# Altium PCB PCB1.PcbDoc
Units mm, origin at the board's own origin, x right, y up, seen from the top; angles counter-clockwise.
Board outline 77.47 x 44.45 mm, 2 copper layers (Top Layer, Bottom Layer); 11 components, 4 nets, 28 pads, 0 vias.
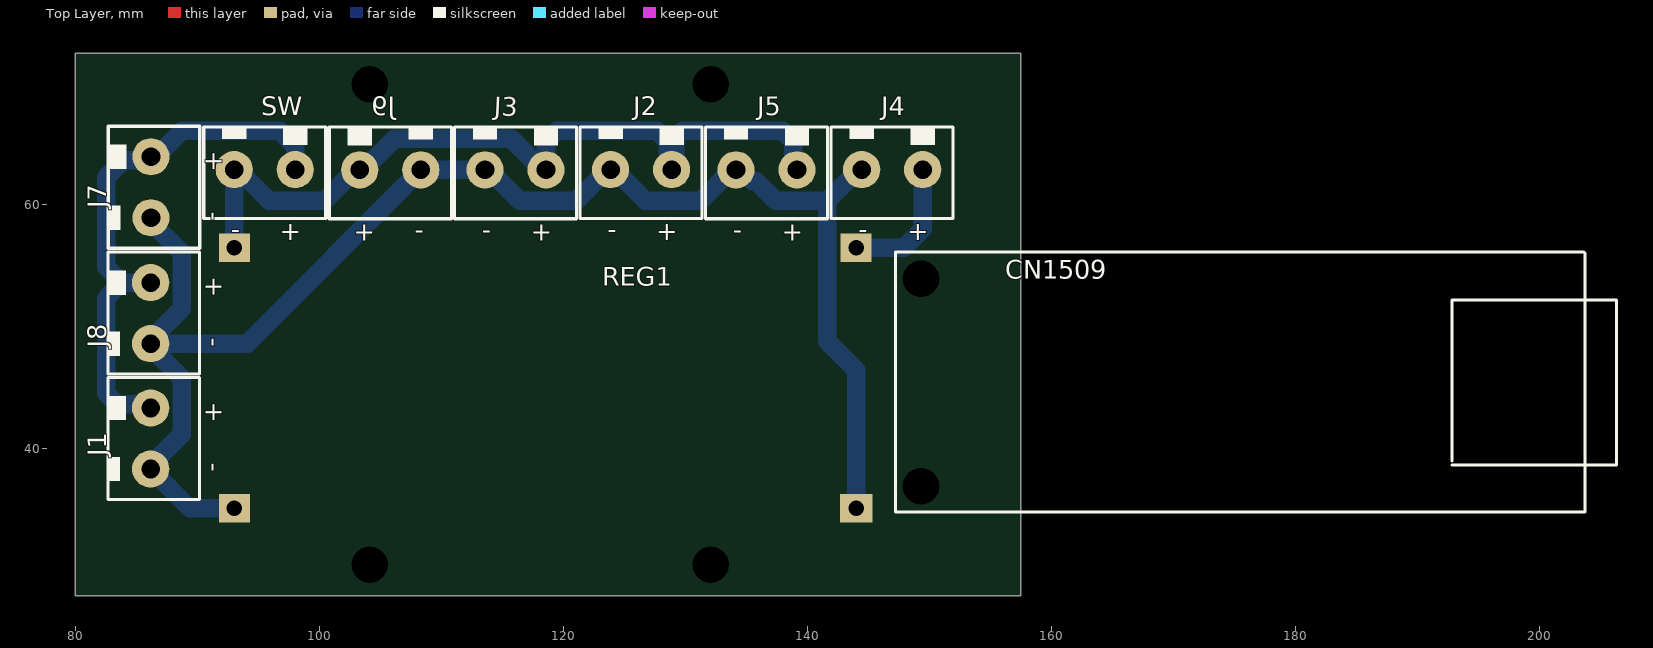
[diagram p0: Top Layer view]
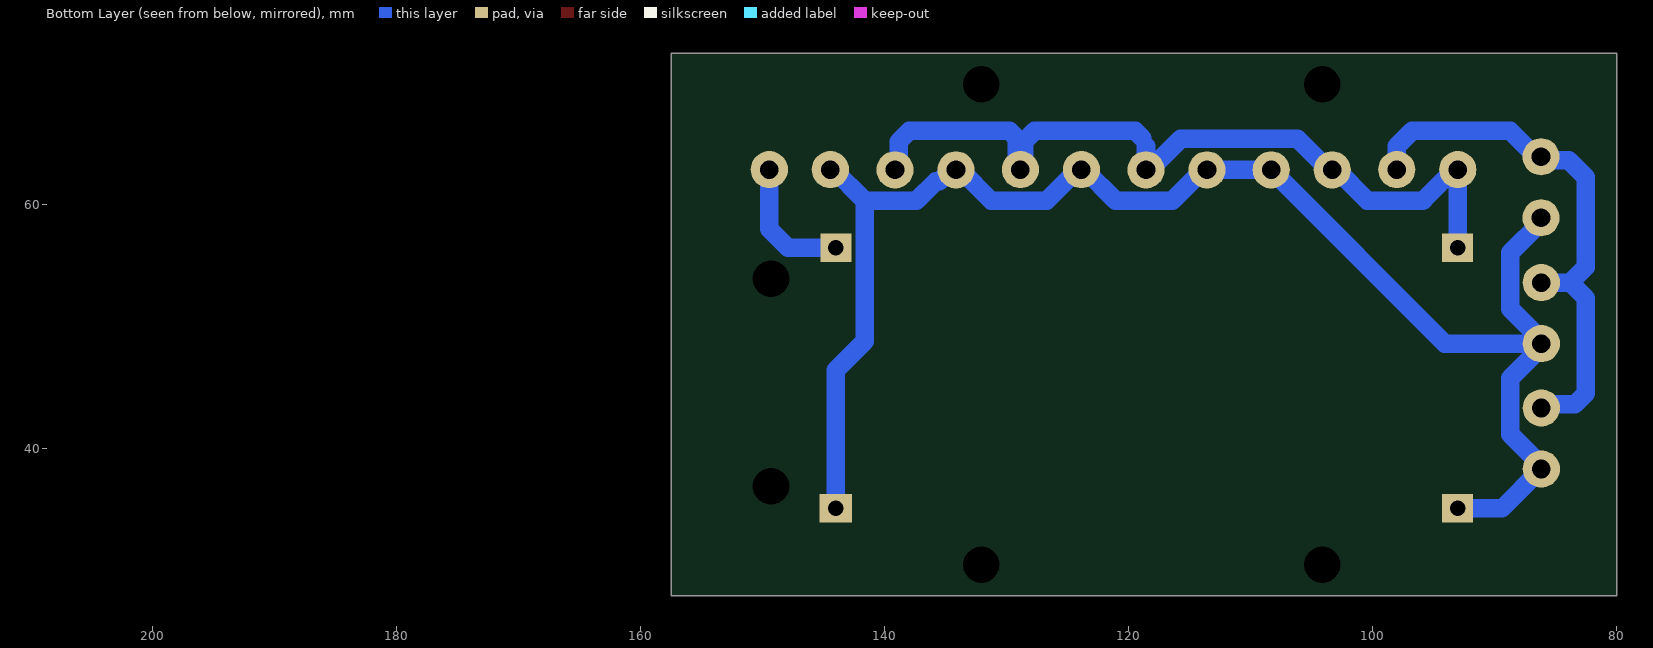
[diagram p1: Bottom Layer view, seen from below]

## Layer stack, top to bottom
Top Solder: solder mask 0.0102, Solder Resist, Dk 3.5
Top Layer: signal copper 0.0356
Dielectric 1: dielectric 0.32, FR-4, Dk 4.8
Bottom Layer: signal copper 0.0356
Bottom Solder: solder mask 0.0102, Solder Resist, Dk 3.5

## Board outline
80.01,27.94 80.01,72.39 157.48,72.39 157.48,27.94

## Design rules (kind name [scope] priority, off if disabled: settings)
Clearance [All] p1: gap=0.254 ignorepadtopadclearanceinfootprint=FALSE except(0: Arc-Hole Track-Hole SMDPad-Hole THPad-Hole Via-Hole Fill-Hole Poly-Hole Region-Hole Text-Hole)
PolygonConnect [All] p1: connectstyle=Relief reliefconductorwidth=0.254 reliefentries=4 polygonreliefangle="90 Angle" airgapwidth=0.254
RoutingVias [All] p1: holewidth=0.711 width=1.27 viastyle="Through Hole" minholewidth=0.711 minwidth=1.27 maxholewidth=0.711 maxwidth=1.27
SolderMaskExpansion [All] p1: expansion=0.102
Width [All] p1: maxlimit=2.032 minlimit=1.27 preferedwidth=1.524
30 further rules are at their usual default settings.

## Components (designator, comment, footprint, x,y, rotation, side; value= is the part's Value field where it differs from the comment)
CN1509 "CN1509" cn1509 149.301,45.415 r90 top
J1 "Bateria" CONN2 86.182,40.832 r270 top
J2 "Driver 2" CONN2 126.365,62.865 r180 top
J3 "Driver 1" CONN2 116.078,62.84 r180 top
J4 "Salida 5V" CONN2 146.939,62.865 r180 top
J5 "Salida Luces" CONN2 136.641,62.84 r180 top
J7 "Cargador de Bateria" CONN2 86.208,61.417 r270 top
J8 "Pantalla Bateria" CONN2 86.182,51.105 r270 top
J9 "Salida Regulador" CONN2 105.816,62.84 r0 top
REG1 "Voltage regulator IN: 7-35V OUT: ADJ" CP8-ADJ 118.516,46.304 r0 top
SW "SWITCH" CONN2 95.529,62.865 r180 top

## Footprints (in the part's own frame and the unit in brackets; to place one, negate y for a bottom-side part, rotate by r counter-clockwise, add the part's x,y. Pads: shape width x height; smd on the part's side, far side on the other; paste and mask are expansions set on the pad)
cn1509 [mm]
  round 0 hole 3 unplated: 4(-8.5,0) 5(8.5,0)
  silkscreen extent -10.6,-57 10.68,2.1, body extent -10.52,-56.49 10.68,2.01, height 12.6
CONN2 [mil]
  round 120 hole 60: 1(-98.43,0) 2(98.43,0)
  silkscreen extent -197,-138 197,157, body extent -197,-138 197,157, height 394
CP8-ADJ [mil]
  rect 100x92 hole 50: IN+(-1003,400) IN-(-1003,-441) OUT+(1003,400)
  rect 106x92 hole 50: OUT-(1003,-441)
  body extent -1058,-497 1068,448, height 573

## Part data
J1 J2 J3 J4 J5 J7 J8 J9 SW: library part Bornera
REG1: library part CP8-ADJ, DeviceSetName=CP8-ADJ, GateName_1=G$1, LibraryName=userlib, Package=CP8-ADJ, SymbolName_1=VREG-CP8

## Free pads (board coordinates)
  round 0 hole 3 unplated: 4(104.14,30.48) 5(104.14,69.85) 6(132.08,30.48) 7(132.08,69.85)

## Nets (pads, with @x,y where several pads share a name; then routed paths per layer and width w, separated by ;. In a path a pad name is that pad's centre, name@x,y a point inside that pad or via, vN(x,y) a via of type N, cw(c..) or ccw(c..) an arc to the next point about the centre after c; other vN are vias at no path point)
GND: J1.2 J2.2 J3.2 J4.2 J5.2 J7.2 J8.2 J9.2 REG1.IN- REG1.OUT- | length 129.6
  Bottom Layer w1.524: J7.2 86.208,58.558 88.722,56.044 88.722,51.453 86.182,48.913 J8.2 ; REG1.IN- 89.412,35.103 J1.2 86.182,38.641 88.722,41.181 88.722,45.757 86.182,48.297 J8.2 ; REG1.OUT- 143.993,46.424 141.616,48.8 141.616,60.3 ; J4.2 144.182,62.865 141.616,60.3 ; J8.2 94.082,48.605 J9.2 J3.2 113.886,62.84 116.426,60.3 121.042,60.3 123.608,62.865 J2.2 124.173,62.865 126.713,60.325 131.268,60.325 133.782,62.84 J5.2 134.554,62.84 135.493,61.9 135.788,61.9 137.389,60.3 141.616,60.3
NetJ1_1: J1.1 J7.1 J8.1 SW.1 | length 44.7
  Bottom Layer w1.524: J1.1 85.891,43.624 83.443,43.624 82.55,44.517 82.55,52.335 83.82,53.605 ; J8.1 83.82,53.605 ; SW.1 98.029,64.77 96.759,66.04 88.743,66.04 86.62,63.917 J7.1 85.916,63.626 83.946,63.626 82.55,62.23 82.55,54.875 83.82,53.605
NetJ2_1: J2.1 J3.1 J5.1 J9.1 REG1.IN+ SW.2 | length 66.2
  Bottom Layer w1.524: REG1.IN+ 93.035,56.47 93.035,62.86 SW.2 93.338,62.865 95.878,60.325 100.443,60.325 102.957,62.84 J9.1 103.625,62.84 106.165,65.38 115.73,65.38 118.27,62.84 J3.1 118.578,64.77 ; 118.87,65.439 119.471,66.04 127.681,66.04 128.573,65.147 128.573,63.157 J2.1 129.157,63.157 129.157,65.439 129.758,66.04 137.957,66.04 138.85,65.147 138.85,63.131 J5.1
NetJ4_1: J4.1 REG1.OUT+ | length 11.2
  Top Layer w2.032: REG1.OUT+ REG1.OUT+@144.145,56.312
  Bottom Layer w1.524: REG1.OUT+ 147.904,56.464 149.439,57.999 J4.1
pads on no net: CN1509.4 CN1509.5

## Silkscreen, mask and mechanical layers (free items; w line width, h text height)
Mechanical 1:
  the board outline again, w0.254
Mechanical 2:
  the board outline again, w0.254

## Text inside footprints (layer, text, board x,y; h text height)
J1: Top Overlay "-" at 90.682,38.832 h1.52 r270; Top Overlay "+" at 90.682,43.832 h1.52 r270
J2: Top Overlay "-" at 124.365,58.365 h1.52 r180; Top Overlay "+" at 129.365,58.365 h1.52 r180
J3: Top Overlay "-" at 114.078,58.34 h1.52 r180; Top Overlay "+" at 119.078,58.34 h1.52 r180
J4: Top Overlay "-" at 144.939,58.365 h1.52 r180; Top Overlay "+" at 149.939,58.365 h1.52 r180
J5: Top Overlay "-" at 134.641,58.34 h1.52 r180; Top Overlay "+" at 139.641,58.34 h1.52 r180
J7: Top Overlay "-" at 90.708,59.417 h1.52 r270; Top Overlay "+" at 90.708,64.417 h1.52 r270
J8: Top Overlay "+" at 90.682,54.105 h1.52 r270; Top Overlay "-" at 90.682,49.105 h1.52 r270
J9: Top Overlay "-" at 107.816,58.34 h1.52 r180; Top Overlay "+" at 102.816,58.34 h1.52 r180
REG1: Mechanical 3 "IN+" at 95.25,55.88 h1.52; Mechanical 3 "IN -" at 95.25,34.29 h1.52; Mechanical 3 "OUT-" at 135.89,34.29 h1.52; Mechanical 3 "0UT+" at 135.89,55.88 h1.52; Mechanical 5 "VALUE" at 95.656,32.334 h1.97
SW: Top Overlay "-" at 93.529,58.365 h1.52 r180; Top Overlay "+" at 98.529,58.365 h1.52 r180